# Altium PCB MF-CI.4.2-SDW.PcbDoc
Units mm, origin at the board's own origin, x right, y up, seen from the top; angles counter-clockwise.
Board outline 83 x 16.18 mm, 4 copper layers (Top Layer 1, Layer 2, Layer 3, Bottom Layer 1), stack 1.595 mm thick; 24 components, 46 nets, 140 pads, 9 vias.
Unrouted connection lines stored in the file: 135.
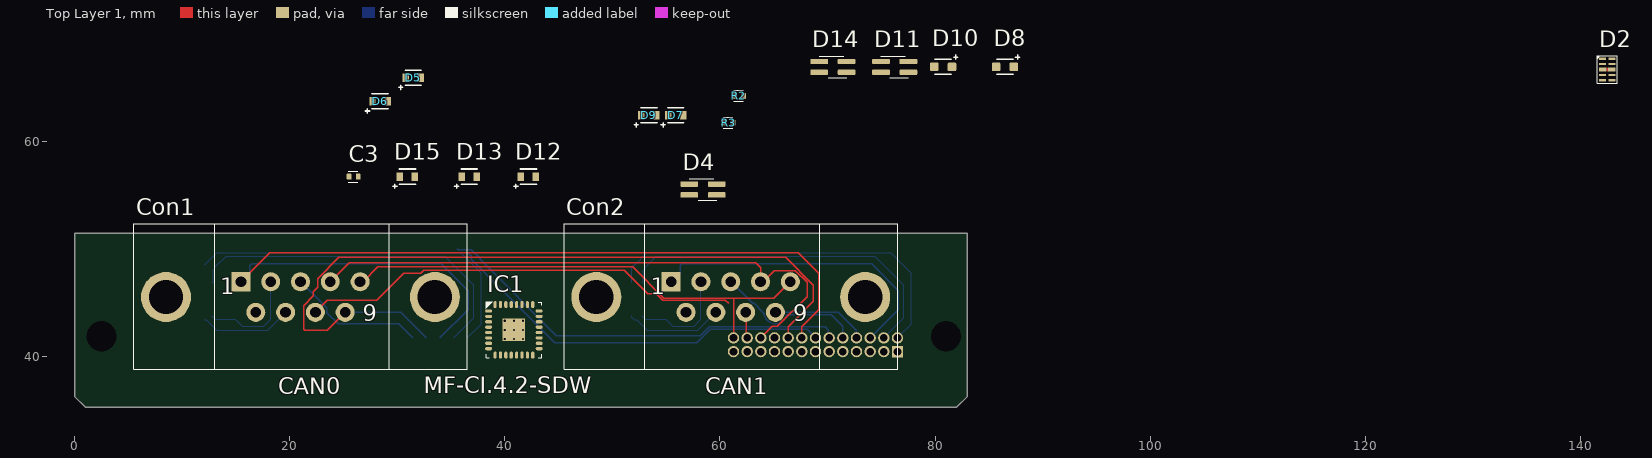
[diagram p0: Top Layer 1 view]
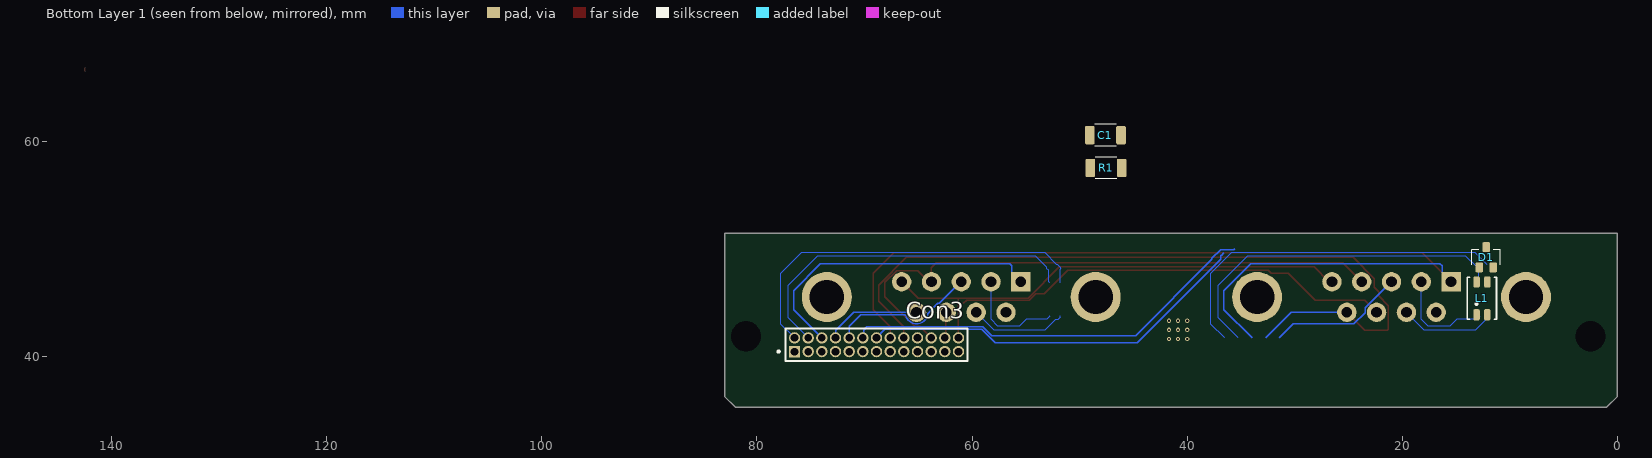
[diagram p1: Bottom Layer 1 view, seen from below]
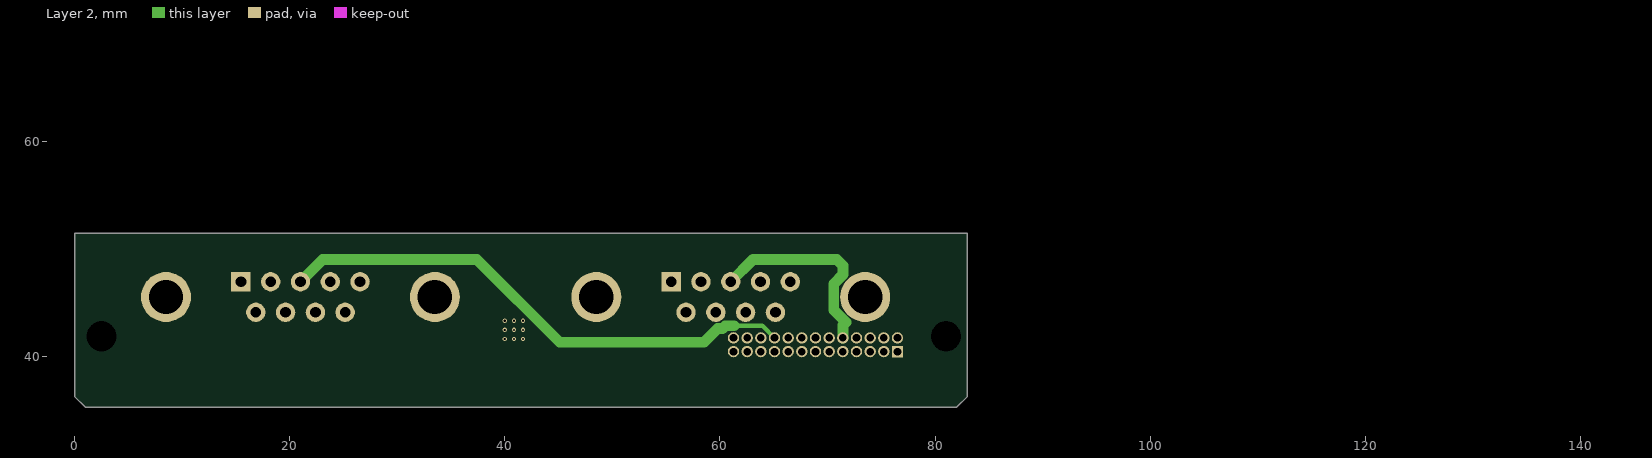
[diagram p2: Layer 2]

## Layer stack, top to bottom
Top Solder: solder mask 0.0102, Solder Resist, Dk 3.5
Top Layer 1: signal copper 0.07
Dielectric 4: prepreg 0.11, PP-004, Dk 3.8
Layer 2: signal copper 0.0175
Dielectric 1: core 1.2, Core-039, Dk 4.8
Layer 3: signal copper 0.0175
Dielectric 5: prepreg 0.11, PP-004, Dk 3.8
Bottom Layer 1: signal copper 0.07
Bottom Solder: solder mask 0.0102, Solder Resist, Dk 3.5

## Board outline
1.006,35.25 0.006,36.25 0.006,51.43 83.006,51.43 83.006,36.25 82.006,35.25

## Design rules (kind name [scope] priority, off if disabled: settings)
BoardOutlineClearance BOARDOUTLINE-TO-MH [InPadClass('MH')] p1: gap=0.1 ignorepadtopadclearanceinfootprint=FALSE
BoardOutlineClearance BOARDOUTLINE-TO-SHELL [InPadClass('SHELL')] p2: gap=0 ignorepadtopadclearanceinfootprint=FALSE
BoardOutlineClearance GENERAL [All] p3: gap=0.5 ignorepadtopadclearanceinfootprint=FALSE
Clearance Clearance_MH [InPadClass('MH')] p1: gap=0.5 ignorepadtopadclearanceinfootprint=FALSE
Clearance Clearance_OUTER_LAYERS [InLayerClass('OUTER_LAYERS')] p2: gap=0.1 ignorepadtopadclearanceinfootprint=FALSE except(0.15: Arc-Poly Track-Poly SMDPad-Poly THPad-Poly Via-Poly Fill-Poly Poly-Poly)
Clearance Clearance_INNER_LAYERS [InLayerClass('INNER_LAYERS')] p3: gap=0.1 ignorepadtopadclearanceinfootprint=FALSE except(0.2: Arc-Hole Track-Hole SMDPad-Hole THPad-Hole Via-Hole Fill-Hole Poly-Hole Region-Hole Text-Hole)
Clearance [All] p4: gap=0.1 ignorepadtopadclearanceinfootprint=FALSE
ComponentClearance [All] p1: gap=0 collisioncheckmode=3 verticalgap=0 showdistances=FALSE
DiffPairsRouting DIFF_Zd=100 [InDifferentialPairClass('Zd=100')] p1: maxlimit=0.18 minlimit=0.18 mostfreqgap=0.18 toplayer_minwidth=0.1 toplayer_maxwidth=0.12 toplayer_prefwidth=0.1 midlayer2_minwidth=0.1 midlayer2_maxwidth=0.1 midlayer2_prefwidth=0.1 midlayer3_minwidth=0.1 midlayer3_maxwidth=0.12 midlayer3_prefwidth=0.1 bottomlayer_minwidth=0.1 bottomlayer_maxwidth=0.12 bottomlayer_prefwidth=0.1 maxuncoupledlength=30
DiffPairsRouting DIFF_Zd=100_Eth [InDifferentialPairClass('Zd=100_Eth')] p2: maxlimit=0.24 minlimit=0.18 mostfreqgap=0.24 toplayer_mingap=0.24 toplayer_minwidth=0.4 toplayer_maxwidth=0.4 toplayer_prefwidth=0.4 midlayer2_maxgap=0.18 midlayer2_prefgap=0.18 midlayer2_minwidth=0.1 midlayer2_maxwidth=0.1 midlayer2_prefwidth=0.1 midlayer3_maxgap=0.18 midlayer3_prefgap=0.18 midlayer3_minwidth=0.1 midlayer3_maxwidth=0.12 midlayer3_prefwidth=0.1 bottomlayer_mingap=0.24 bottomlayer_minwidth=0.4 bottomlayer_maxwidth=0.4 bottomlayer_prefwidth=0.4 maxuncoupledlength=30
HoleSize [All] p1: absolutevalues=TRUE maxlimit=3.5 minlimit=0.2 maxpercent=80.000 minpercent=20.000
MatchedLengths DIFFPAIR_Group [InDifferentialPairClass('Zd=100')] p1: tolerance=0.051 checknetsindiffpair=FALSE checkdiffpairvsdiffpair=TRUE checkxsignals=TRUE checkothers=TRUE
MatchedLengths DIFFPAIR_Within [InDifferentialPairClass('Zd=100')] p2: tolerance=0.381 checknetsindiffpair=TRUE checkdiffpairvsdiffpair=FALSE checkxsignals=FALSE checkothers=FALSE
MinimumSolderMaskSliver [All] p1: minsoldermaskwidth=0.098
PasteMaskExpansion [All] p1: expansion=-0.025
PlaneConnect [All] p1: planeconnectstyle=Direct reliefexpansion=0.508 reliefentries=4 reliefconductorwidth=0.254 reliefairgap=0.254
PolygonConnect [All] p1: connectstyle=Direct reliefconductorwidth=0.254 reliefentries=4 polygonreliefangle="90 Angle" airgapwidth=0.254
RoutingVias [All] p1: holewidth=0.2 width=0.4 viastyle="Through Hole" minholewidth=0.2 minwidth=0.4 maxholewidth=0.2 maxwidth=0.4
ShortCircuit ShortCircuit_EMMC [InNetClass('EMMC') or InNet('GND') or InNet('NetC158_2') vs HasFootprint('BGA153_MTFC4GLGDM-AIT A')] p1: allowed=TRUE
ShortCircuit [All] p2: allowed=FALSE
SilkToSilkClearance [All] p1: silktosilkclearance=0.1
SilkToSolderMaskClearance [IsPad] p1: minsilkscreentomaskgap=0 clearancetoexposedcopper=FALSE
SolderMaskExpansion [All] p1: expansion=0.05 istentingtop=FALSE
Width Width_Zo=40 [InNetClass('Zo=40')] p1: maxlimit=0.18 minlimit=0.12 preferedwidth=0.18 midlayer2_minwidth=0.18 midlayer3_maxwidth=0.12 midlayer3_prefwidth=0.12 minimp=50.000000 maximp=50.000000 favimp=50.000000
Width [All] p2: maxlimit=2 minlimit=0.12 preferedwidth=0.12 midlayer2_maxwidth=1 midlayer3_maxwidth=1 minimp=50.000000 maximp=50.000000 favimp=50.000000
Width Width_PWR [InNetClass('PWR')] p3: maxlimit=10 minlimit=0.1 preferedwidth=0.25
Width Width_Zo=50 [InNetClass('Zo=50')] p4: maxlimit=0.12 minlimit=0.12 preferedwidth=0.12
21 further rules are at their usual default settings.

## Classes and differential pairs
differential pair CAN0: +CAN0_P -CAN0_N
differential pair _CAN0: +_CAN0_P -_CAN0_N
differential pair CAN1: +CAN1_p -CAN1_n
differential pair _CAN1: +_CAN1_p -_CAN1_n

## Components (designator, comment, footprint, x,y, rotation, side; value= is the part's Value field where it differs from the comment)
C1 "1nF 2000V X7R" 1206 47.6,60.55 r180 bottom value=1nF
C3 "1uF 16V X5R" 0402 25.95,56.7 r0 top
Con1 "15-006443" "DSUB-9 Male D, 2.74" 18.706,33.4 r0 top
Con2 "15-006443" "DSUB-9 Male D, 2.74" 58.706,33.4 r0 top
Con3 "SFMC-113-01-L-D" SAMTEC_SFMC-113-01-L-D 76.506,40.429 r90 bottom
D1 "NUP2125WTT1G" SOT323-3L(SC-70) 12.2,49.2 r90 bottom (schematic designator D2)
D2 "RCLAMP0524P.TCT" SLP2510P8 142.5,66.65 r0 top (schematic designator D1)
D4 "APTF1616SEEZGQBDC" KINGBRIGHT_APTF1616SEEZGQBDC 58.425,55.5 r0 top (schematic designator D9)
D5 "APT1608CGCK" APT1608CGCK 31.5,65.9 r0 top (schematic designator D14)
D6 "APT1608CGCK" APT1608CGCK 28.4,63.7 r0 top (schematic designator D15)
D7 "APT1608CGCK" APT1608CGCK 55.9,62.4 r0 top (schematic designator D12)
D8 "APT1608LSECK/J3-PRV" Kingbright_APT1608LSECK/J3-PRV 86.5,66.9 r0 top (schematic designator D16)
D9 "APT1608CGCK" APT1608CGCK 53.4,62.4 r0 top (schematic designator D13)
D10 "APT1608LSECK/J3-PRV" Kingbright_APT1608LSECK/J3-PRV 80.75,66.9 r0 top (schematic designator D17)
D11 "APTF1616SEEZGQBDC" KINGBRIGHT_APTF1616SEEZGQBDC 76.25,66.9 r0 top (schematic designator D10)
D12 "APT1608CGCK" APT1608CGCK 42.2,56.7 r0 top (schematic designator D18)
D13 "APT1608CGCK" APT1608CGCK 36.7,56.7 r0 top (schematic designator D19)
D14 "APTF1616SEEZGQBDC" KINGBRIGHT_APTF1616SEEZGQBDC 70.5,66.9 r0 top (schematic designator D11)
D15 "APT1608CGCK" APT1608CGCK 30.95,56.7 r0 top (schematic designator D20)
IC1 "LP5024RSMR" QFN-32[8x8]_0,25/0,50_5x5x1_HD[2,10x2,10] 40.85,42.45 r0 top
L1 "200uH" ACT1210L 12.6,45.375 r90 bottom
R1 "Res Chip 1206" 1206 47.55,57.5 r180 bottom
R2 "Res Chip 0402" 0402 61.775,64.2 r0 top (schematic designator R8)
R3 "Res Chip 0402" 0402 60.8,61.7 r0 top (schematic designator R7)

## Footprints (in the part's own frame and the unit in brackets; to place one, negate y for a bottom-side part, rotate by r counter-clockwise, add the part's x,y. Pads: shape width x height; smd on the part's side, far side on the other; paste and mask are expansions set on the pad)
0402 [mm]
  rrect40% 0.45x0.55 smd: 1(-0.425,0) 2(0.425,0)
  silkscreen extent -0.51,-0.51 0.38,0.51, body extent -0.5,-0.25 0.5,0.25, height 0.35
1206 [mm]
  rrect30% 0.9x1.7 smd: 1(-1.45,0) 2(1.45,0)
  silkscreen extent -1.02,-1.02 1.02,1.02, body extent -1.6,-0.8 1.6,0.8, height 0.45
ACT1210L [mm]
  rrect50% 1.05x0.6 smd: 1(-1.525,0.5) 2(-1.525,-0.5) 3(1.525,-0.5) 4(1.525,0.5)
  silkscreen extent -1.95,-1.35 1.95,1.35, body extent -1.95,-1.35 1.95,1.35, height 2.5
APT1608CGCK [mm]
  rect 0.6x0.8 smd: 1(0.7,0) 2(-0.7,0)
  silkscreen extent -1.38,-1.1 0.75,0.7, body extent -0.8,-0.4 0.8,0.4, height 0.4
"DSUB-9 Male D, 2.74" [mm] "15-006443"
  rect 1.77x1.77 / inner rect 1.803x1.803 / far side rect 1.803x1.803 hole 1 mask+0.1: 1(-3.24,13.52)
  round 1.77 / inner round 1.803 / far side round 1.803 hole 1 mask+0.1: 2(-0.47,13.52) 3(2.3,13.52) 4(5.07,13.52) 5(7.84,13.52) 6(-1.855,10.68) 7(0.915,10.68) 8(3.685,10.68) 9(6.455,10.68)
  round 4.65 hole 3.2 mask+0.1: 10(-10.2,12.1) 11(14.8,12.1)
  silkscreen extent -13.19,5.4 17.81,18.9, body extent -13.14,5.4 17.74,18.9, height 24.4
Kingbright_APT1608LSECK/J3-PRV [mm]
  rrect30% 0.8x0.8 smd: 1(-0.825,0) 2(0.825,0)
  silkscreen extent -0.75,-0.7 1.38,1.1, body extent -0.8,-0.4 0.8,0.4, height 0.85
KINGBRIGHT_APTF1616SEEZGQBDC [mm]
  rrect40% 1.65x0.5 smd paste-0.025 mask+0.05: 1(-1.275,0.5) 2(1.275,0.5) 3(1.275,-0.5) 4(-1.275,-0.5)
  silkscreen extent -1.27,-1 1.27,1
QFN-32[8x8]_0,25/0,50_5x5x1_HD[2,10x2,10] [mm]
  oval 0.65x0.3 smd paste-0.025 mask+0.05: 1(-2.35,1.75) 2(-2.35,1.25) 3(-2.35,0.75) 4(-2.35,0.25) 5(-2.35,-0.25) 6(-2.35,-0.75) 7(-2.35,-1.25) 8(-2.35,-1.75) 17(2.35,-1.75) 18(2.35,-1.25) 19(2.35,-0.75) 20(2.35,-0.25) 21(2.35,0.25) 22(2.35,0.75) 23(2.35,1.25) 24(2.35,1.75)
  oval 0.3x0.65 smd paste-0.025 mask+0.05: 9(-1.75,-2.35) 10(-1.25,-2.35) 11(-0.75,-2.35) 12(-0.25,-2.35) 13(0.25,-2.35) 14(0.75,-2.35) 15(1.25,-2.35) 16(1.75,-2.35) 25(1.75,2.35) 26(1.25,2.35) 27(0.75,2.35) 28(0.25,2.35) 29(-0.25,2.35) 30(-0.75,2.35) 31(-1.25,2.35) 32(-1.75,2.35)
  rect 2.1x2.1 smd paste-0.025 mask+0.05: EP(0,0)
  silkscreen extent -2.62,-2.57 2.57,2.62, body extent -2.58,-2.58 2.58,2.58, height 1
SAMTEC_SFMC-113-01-L-D [mm]
  rect 1.06x1.06 hole 0.71: 01(0,0)
  round 1.06 hole 0.71: 02(1.27,0) 03(0,-1.27) 04(1.27,-1.27) 05(0,-2.54) 06(1.27,-2.54) 07(0,-3.81) 08(1.27,-3.81) 09(0,-5.08) 10(1.27,-5.08) 11(0,-6.35) 12(1.27,-6.35) 13(0,-7.62) 14(1.27,-7.62) 15(0,-8.89) 16(1.27,-8.89) 17(0,-10.16) 18(1.27,-10.16) 19(0,-11.43) 20(1.27,-11.43) 21(0,-12.7) 22(1.27,-12.7) 23(0,-13.97) 24(1.27,-13.97) 25(0,-15.24) 26(1.27,-15.24)
  silkscreen extent -0.89,-16.07 2.16,1.58, body extent -0.89,-16.06 2.16,0.83, height 4.57
SLP2510P8 [mm]
  rect 0.675x0.2 smd: 1(-0.437,1) 2(-0.437,0.5) 4(-0.437,-0.5) 5(-0.437,-1) 6(0.437,-1) 7(0.437,-0.5) 9(0.437,0.5) 10(0.437,1)
  rect 0.7x0.4 smd: 3(-0.425,0) 8(0.425,0)
  Top Layer 1 region: -0.076,0.203 -0.076,-0.203 0.076,-0.203 0.076,0.203
  silkscreen extent -0.94,-1.27 0.94,1.27
SOT323-3L(SC-70) [mm]
  rrect30% 0.9x0.7 smd paste-0.025: 1(-0.95,0.65) 2(-0.95,-0.65) 3(0.95,0)
  silkscreen extent -0.67,-1.33 0.67,1.33, body extent -1.2,-1.1 1.2,1.1, height 1.1

## Part data
C1: library part CMP-CAP-002157, "Cap Chip 1nF 2000V X7R 1206", Manufact_1="AVX Corporation", Manufact_Part_Nr_1=1206GC102KAT2A, Voltage_Rating=2000V, DesignID=CMP-CAP-002157, Parameter=X7R, Status=OK, Type=MLCC
C3: library part CC0402KRX5R7BB105, "Capacitor, 1u, 16V, 10%, X5R, 0402"
Con1 Con2: "Conn, D-Sub, Male, 9, 2mm, Str, -40/+105"
Con3: "Conn, Receptacle, Female, 13x2, 1.27mm, Vertical, -55/+125", Manufact_1=Samtec
D1: library part CMP-SEM-000151, "Diode dual TVS, SOT323, bidrectional, CAN-FD", Manufact_1="ON Semiconductor", Supplier Part Number 1=NUP2125WTT1GOSCT-ND, Voltage_Rating=24V, DesignID=CMP-SEM-000151, Manufact_Part_Nr_1=NUP2125WTT1G, Parameter=200W, Supplier 1=Digi-Key, Type="TVS Bidirectional"
D2: library part CMP-SEM-000069, "Diode array TVS, RCLAMP0524P.TCT"
D4 D11 D14: "Diode, LED, Red/Green/Blue, 5V, 20mA, -40/+85", Manufact_1=Kingbright
D5 D6 D7 D9 D12 D13 D15: "Diode, LED, Green, 5V, 20mA, Vertical, -40/+85, 0603"
D8 D10: "Diode, LED, Red, 5V, 20mA, -40/+85", Manufact_1=Kignbright
IC1: "IC, LED Driver, 24 LEDs, 2.7-5.5V, 35mA, -40/+85, VFQFN-32", Manufacturer=TI, Manufacturer_Part_Number=LP5024RSMR
L1: library part CMP-IND-001114, "ACT1210L-201-2P-TL00 -  Filter Common Mode ACT1210L Series 200uH 70mA 2.5mm x 3.9mm x 2.5mm", Manufact_1=TDK, Manufact_Part_Nr_1=ACT1210L-201-2P-TL00, Supplier Part Number 1=445-174934-1-ND, Voltage_Rating=80V, DesignID=CMP-IND-001114, Dummy_PN=ACT1210L-201-2P-TL00, Parameter=0.07A, Status=OK, Supplier 1=Digi-Key, Type="Common Mode Choke"
R1: library part CMP-RST-001901
R2 R3: library part CMP-RST-001998

## Free pads (board coordinates)
  round 1.524 hole 2.8: 3(2.506,41.85) 3(81.006,41.85)

## Via types
v1: diameter 0.4, hole 0.2, Top Layer 1 to Bottom Layer 1, tented both sides, 9 vias

## Nets (pads, with @x,y where several pads share a name; then routed paths per layer and width w, separated by ;. In a path a pad name is that pad's centre, name@x,y a point inside that pad or via, vN(x,y) a via of type N, cw(c..) or ccw(c..) an arc to the next point about the centre after c; other vN are vias at no path point)
12_VISO0_FAIL: D8.1 IC1.11
12_VISO1_FAIL: D10.1 IC1.12
12V_ISO0_SW: D5.1 IC1.9
12V_ISO1_SW: D6.1 IC1.10
_CAN0_N: Con1.2 L1.4 | length 9.6
  Bottom Layer 1 w0.1: 12.8,43.775 12.8,43.692 13.042,43.45 14.952,43.45 15.602,42.8 17.6,42.8 18.236,43.436 Con1.2
_CAN0_P: Con1.7 L1.3 | length 8.7
  Bottom Layer 1 w0.1: 12.042,43.376 12.25,43.376 13.226,42.4 17.941,42.4 Con1.7
_CAN1_n: Con2.2 | length 9.6
  Bottom Layer 1 w0.1: 52.8,43.775 52.8,43.692 53.042,43.45 54.952,43.45 55.602,42.8 57.6,42.8 58.236,43.436 Con2.2
_CAN1_p: Con2.7 | length 9.2
  Bottom Layer 1 w0.1: 51.8,43.775 51.8,43.618 52.042,43.376 52.25,43.376 53.226,42.4 57.941,42.4 Con2.7
AGND: C1.1 R1.2
CAN0_N: Con3.14 D1.2 L1.1 | length 36.8
  Bottom Layer 1 w0.12: 36.6,49.6 36.8,49.4 36.83,49.4 36.9,49.33 36.9,49 44.65,41.25 57.85,41.25 59.1,42.5 68.1,42.5 68.886,41.714 Con3.14
CAN0_P: Con3.12 D1.1 L1.2 | length 39.1
  Bottom Layer 1 w0.12: 35.6,50 35.6,49.97 35.67,49.9 36.9,49.9 37.7,49.1 37.7,49 44.8,41.9 58.189,41.9 59.009,42.72 69.78,42.72 70.091,42.409 70.091,41.765 Con3.12
CAN0_VCC_12V: Con1.9 Con3.18 | length 72.3
  Top Layer 1 w0.12: Con1.9 23.481,42.4 21.4,42.4 21.3,42.5 21.3,44.7 22.2,45.6 22.2,46 22.6,46.4 22.6,47.221 24.579,49.2 66.1,49.2 68.7,46.6 68.7,45.1 66.346,42.746 Con3.18
  Bottom Layer 1 w0.12: Con1.9 30.316,44.08 32.696,41.699
CAN0_VCC_12V_SW: Con1.1 Con3.16 | length 91
  Top Layer 1 w0.12: Con1.1 18.146,49.6 67.3,49.6 69.2,47.7 69.2,44.3 67.616,42.716 Con3.16
  Bottom Layer 1 w0.12: Con1.1 16.308,47.762 16.308,48.408 16.5,48.6 34.1,48.6 36.6,46.1 36.6,44.333 33.966,41.699
CAN1_n: Con3.04 | length 32.8
  Bottom Layer 1 w0.1: 52.8,46.825 52.877,46.902 52.877,47.977 53.05,48.15 53.05,48.25 54.1,49.3 74.4,49.3 77.1,46.6 77.1,43.563 Con3.04
CAN1_p: Con3.02 | length 35.4
  Bottom Layer 1 w0.1: 51.8,46.825 51.8,48.1 51.75,48.15 51.75,48.22 52.046,48.516 52.116,48.516 53.2,49.6 75.9,49.6 77.8,47.7 77.8,42.993 Con3.02
CAN1_VCC_12V: Con2.9 Con3.08 | length 8.9
  Bottom Layer 1 w0.12: Con2.9 71.02,44.08 72.696,42.404 Con3.08
CAN1_VCC_12V_SW: Con2.1 Con3.06 | length 28.7
  Bottom Layer 1 w0.12: Con2.1 56.308,47.762 56.308,48.408 56.5,48.6 74.1,48.6 76.6,46.1 76.6,44.333 Con3.06
"CLK_SYNC ": Con1.4 Con2.4 Con3.22 | length 54.7
  Top Layer 1 w0.12: Con1.4 25.536,48.68 63.32,48.68 63.776,48.224 Con2.4 64.02,46.92 65.065,47.965 67.024,47.965 68.1,46.889 68.1,45.541 65.322,42.763 64.87,42.763 Con3.22
DIG_IO0: D2.4 D2.7
DIG_IO0_LED: D12.1 IC1.18
DIG_IO1: D2.2 D2.9
DIG_IO1_LED: D13.1 IC1.19
GND: C1.2 C3.1 Con1.6 Con2.6 D2.3 D2.8 IC1.EP R1.1 R3.2
  other v1: 40,41.6 40.85,41.6 41.7,41.6 40,42.45 40.85,42.45 41.7,42.45 40,43.3 40.85,43.3 41.7,43.3
GND_ISO0: Con1.3 Con3.20 D1.3 | length 62.1
  Layer 2 w0.4: 61.3,42.829 63.946,42.829 Con3.20
  Layer 2 w1: Con1.3 23.086,49 37.4,49 45.1,41.3 58.522,41.3 59.8,42.578 60.243,42.578 60.495,42.829 61.3,42.829
  Bottom Layer 1 w0.12: Con1.3 21.053,46.92 23.453,44.52 23.453,44.047 24.5,43 30.126,43 31.426,41.699
GND_ISO1: Con2.3 Con3.10 | length 33.3
  Layer 2 w1: Con2.3 63.086,49 70.87,49 71.456,48.414 71.456,47.586 70.581,46.712 70.581,44.288 71.72,43.15 71.438,42.867 71.438,41.711 Con3.10
  Bottom Layer 1 w0.12: Con2.3 61.053,46.92 63.073,44.9 63.186,44.9 64.074,44.012 64.104,43.982 ccw(c65.161,44.08) 66.186,43.803 66.208,43.825 66.243,43.86 70.34,43.86 70.375,43.825 71.426,42.774 Con3.10
NetC2_1: IC1.32
NetD4_2: D4.2 IC1.3
NetD4_3: D4.3 IC1.2
NetD4_4: D4.4 IC1.1
NetD7_1: D7.1 IC1.4
NetD9_1: D9.1 IC1.8
NetD11_2: D11.2 IC1.17
NetD11_3: D11.3 IC1.15
NetD11_4: D11.4 IC1.13
NetD14_2: D14.2 IC1.24
NetD14_3: D14.3 IC1.23
NetD14_4: D14.4 IC1.22
NetIC1_25: IC1.25 R2.2
NetIC1_30: IC1.30 R2.1
NetIC1_31: IC1.31 R3.1
PPS_EXT: Con1.5 Con2.5 Con3.26 D2.1 D2.10 | length 46.1
  Top Layer 1 w0.12: Con1.5 26.82,46.92 28.2,48.3 51.9,48.3 54.8,45.4 61.266,45.4 ; Con3.26 61.266,45.4 ; Con2.5 66.523,46.92 65.004,45.4 61.266,45.4
PPS_EXT_LED: D15.1 IC1.20
SBMCU_I2C0_SCL: Con3.15 IC1.29
SBMCU_I2C0_SDA: Con3.13 IC1.28
TRIGGER_SYNC: Con1.8 Con2.8 Con3.24 | length 43.7
  Top Layer 1 w0.12: Con1.8 23.511,45.2 28.1,45.2 30.6,47.7 32.192,47.7 32.477,47.985 51.115,47.985 53.3,45.8 54.089,45.8 54.709,45.18 60.52,45.18 60.8,44.9 ; Con2.8 62.464,44.007 62.464,41.772 Con3.24
VCC_3V3: C3.2 Con3.01 Con3.03 D4.1 D5.2 D6.2 D7.2 D8.2 D9.2 D10.2 D11.1 D12.2 D13.2 D14.1 D15.2 IC1.27
pads on no net: Con1.10 Con1.11 Con2.10 Con2.11 Con3.05 Con3.07 Con3.09 Con3.11 Con3.17 Con3.19 Con3.21 Con3.23 Con3.25 D2.5 D2.6 IC1.5 IC1.6 IC1.7 IC1.14 IC1.16 IC1.21 IC1.26
copper on no net: | length 66.3
  Bottom Layer 1 w0.1: 12.116,48.516 13.2,49.6 35.9,49.6 37.8,47.7 37.8,42.993 36.506,41.699 ; 12.8,46.825 12.877,46.902 12.877,47.977 13.05,48.15 13.05,48.25 14.1,49.3 34.4,49.3 37.1,46.6 37.1,43.563 35.236,41.699

## Silkscreen, mask and mechanical layers (free items; w line width, h text height)
Top Overlay:
  text "MF-CI.4.2-SDW" at 32.454,36.554 h1.52
  text "CAN0" at 18.954,36.454 h1.52
  text "CAN1" at 58.654,36.454 h1.52
Mechanical 10:
  drawing of 156 lines, arcs and shapes, not listed

## Text inside footprints (layer, text, board x,y; h text height)
Con1: Top Overlay "9" at 26.8,43.254 h1.52; Top Overlay "1" at 13.56,45.754 h1.52
Con2: Top Overlay "9" at 66.8,43.254 h1.52; Top Overlay "1" at 53.56,45.754 h1.52